# Altium PCB intento2_PCB.PcbDoc
Units mil, origin at the board's own origin, x right, y up, seen from the top; angles counter-clockwise.
Board outline 1520 x 850 mil, 2 copper layers (Top Layer, Bottom Layer); 13 components, 9 nets, 42 pads, 31 vias.
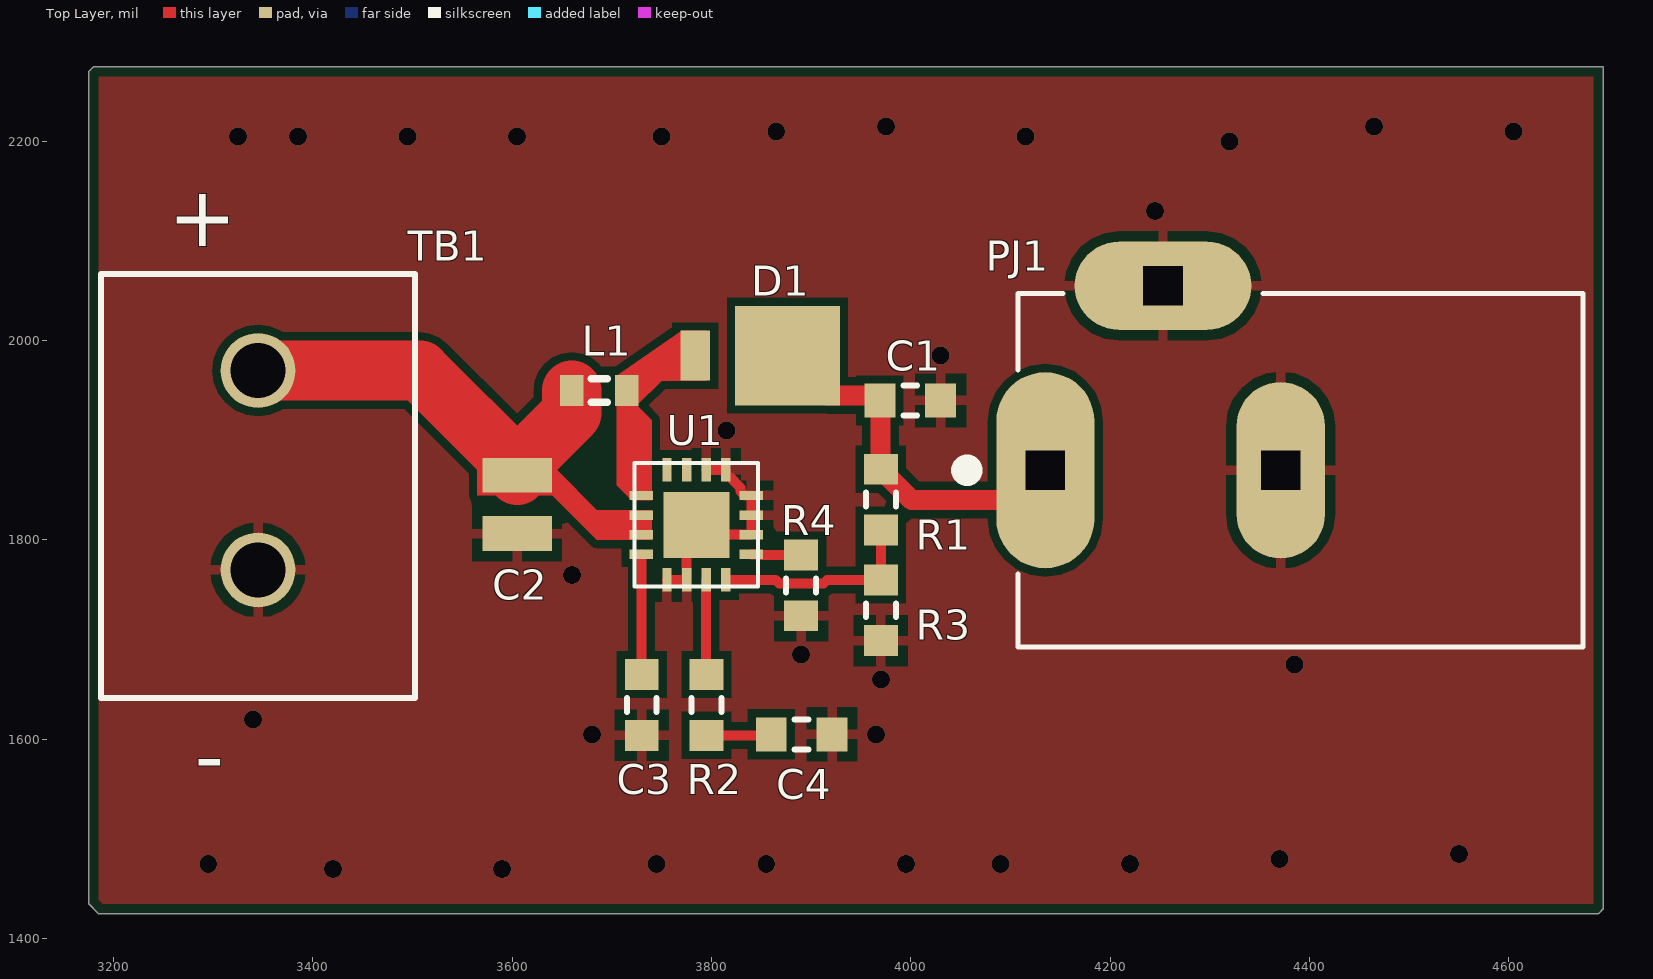
[diagram p0: Top Layer view]
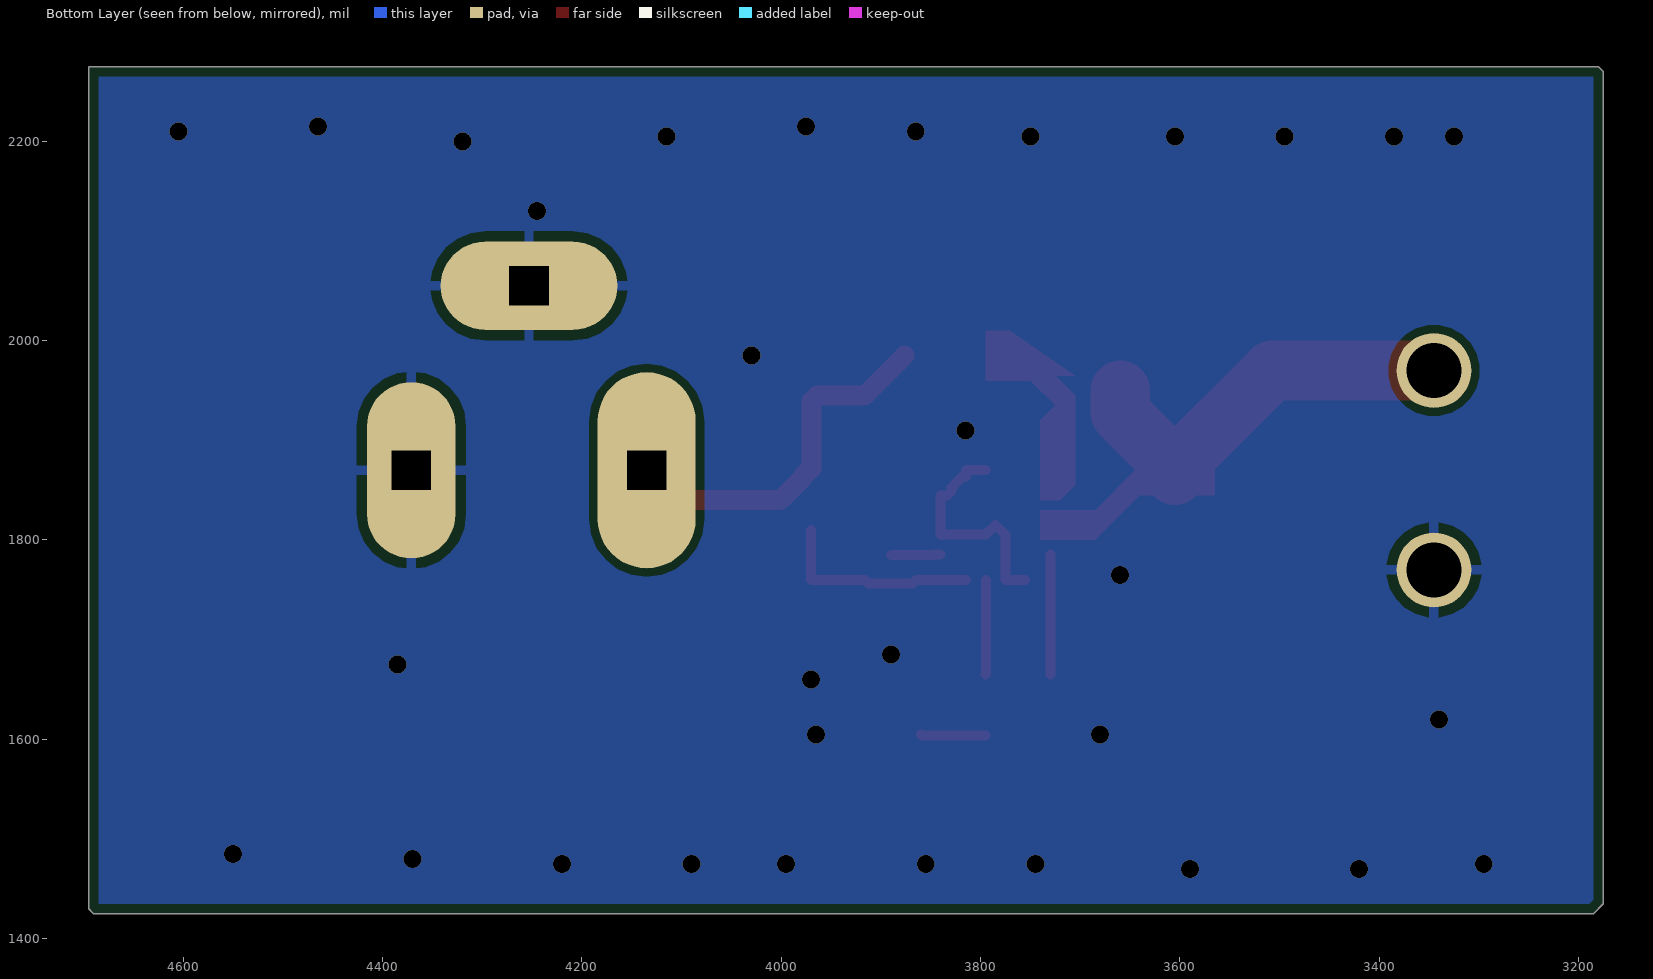
[diagram p1: Bottom Layer view, seen from below]
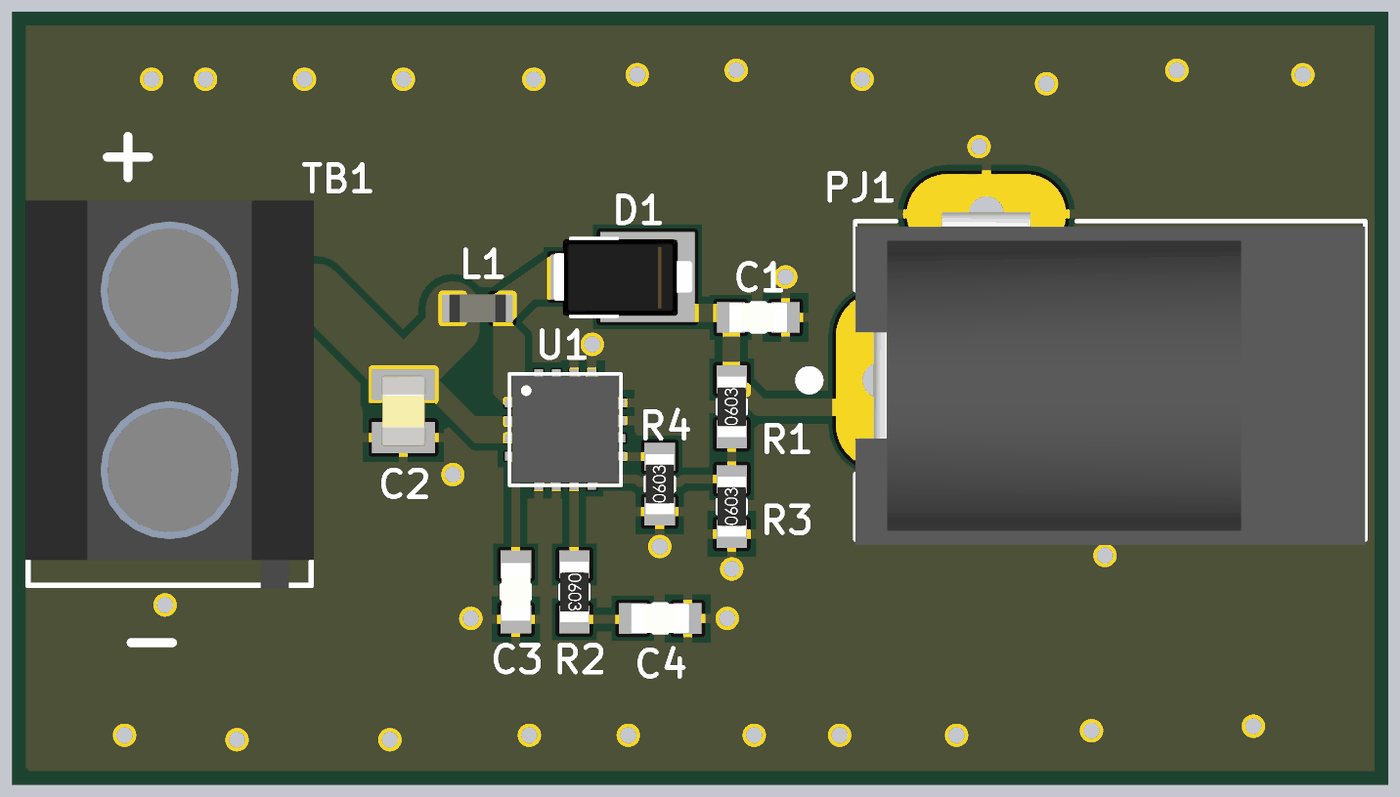
[diagram p2: 3D render of the assembled board from above, using the file's embedded part models]

## Layer stack, top to bottom
Top Solder: solder mask 0.4, Solder Resist, Dk 3.5
Top Layer: signal copper 1.4
Dielectric 1: dielectric 12.6, FR-4, Dk 4.8
Bottom Layer: signal copper 1.4
Bottom Solder: solder mask 0.4, Solder Resist, Dk 3.5

## Board outline
3175,1435 3175,2270 3180,2275 4695,2275 4695,1430 4690,1425 3185,1425

## Design rules (kind name [scope] priority, off if disabled: settings)
BoardOutlineClearance [All] p1: gap=8 ignorepadtopadclearanceinfootprint=FALSE
Clearance [All] p1: gap=8 ignorepadtopadclearanceinfootprint=FALSE
HoleSize [All] p1: absolutevalues=TRUE maxlimit=500 minlimit=12 maxpercent=80.000 minpercent=20.000
HoleToHoleClearance [All] p1: gap=14 allowstackedmicrovias=TRUE
MinimumSolderMaskSliver [All] p1: minsoldermaskwidth=4
PolygonConnect PolygonConnect_via [IsVia] p1: connectstyle=Direct reliefconductorwidth=10 reliefentries=4 polygonreliefangle="90 Angle" airgapwidth=10
PolygonConnect [All] p2: connectstyle=Relief reliefconductorwidth=10 reliefentries=4 polygonreliefangle="90 Angle" airgapwidth=10
RoutingVias [All] p1: holewidth=12 width=40 viastyle="Through Hole" minholewidth=12 minwidth=18 maxholewidth=100 maxwidth=50
SilkToSilkClearance [All] p1: silktosilkclearance=2
SilkToSolderMaskClearance [IsPad] p1: minsilkscreentomaskgap=0.1 clearancetoexposedcopper=TRUE
SolderMaskExpansion [All] p1: expansion=4 istentingtop=FALSE
SupplyNets "Schematic Supply Nets_2" [InNet('12V')] p1: voltage=0.000
SupplyNets "Schematic Supply Nets_1" [InNet('GND')] p2: voltage=0.000
SupplyNets "Schematic Supply Nets" [InNet('24V')] p3: voltage=0.000
Width width_24 [InNetClass('24V_CLASS')] p1: maxlimit=30 minlimit=20 preferedwidth=30
Width Width_12 [InNetClass('12VCLASS')] p2: maxlimit=60 minlimit=15 preferedwidth=60
Width [All] p3: maxlimit=10 minlimit=10 preferedwidth=10
25 further rules are at their usual default settings.

## Classes and differential pairs
net class 24V_CLASS: 24V
net class 12VCLASS: 12V NetD1_1

## Components (designator, comment, footprint, x,y, rotation, side; value= is the part's Value field where it differs from the comment)
C1 "10u" CAP_0603 3999.5,1940 r180 top
C2 "33u" CAP_0805 3605,1806.34 r90 top
C3 "22nF" CAP_0603 3730,1634.5 r90 top value=22n
C4 "22nF" CAP_0603 3890.5,1605 r180 top value=22n
D1 "SS3P4-M3/84A" "DO-220AA(POWER DIODE)" 3830,1985 r180 top
L1 "IND 15UH 2MA 1.5 OHM" L_0603 3687.44,1950 r0 top value=15u
PJ1 "CONN PWR JACK 2.5X5.5MM SOLDER" PWR_JACK_2.50mm 4253.11,1962.52 r0 top
R1 "187K" RES_0603 3970,1840.5 r90 top
R2 "1K" RES_0603 3795,1634.5 r270 top
R3 "10K" RES_0603 3970,1729.5 r90 top
R4 "100K" RES_0603 3890,1754.5 r90 top
TB1 "TERM BLK 2P SIDE ENT 5.08MM PCB" TB_2x1_5.08mm 3345,1870 r270 top
U1 "TPS55340RTER" WQFN-16_3X3MM 3784.88,1815.16 r0 top

## Footprints (in the part's own frame and the unit in brackets; to place one, negate y for a bottom-side part, rotate by r counter-clockwise, add the part's x,y. Pads: shape width x height; smd on the part's side, far side on the other; paste and mask are expansions set on the pad)
CAP_0603 [mil]
  rect 31x34 smd: 1(-30.5,0) 2(30.5,0)
  silkscreen extent -7,-15 7,15, body extent -32,-16 32,16
CAP_0805 [mil]
  rect 35x70 smd: 1(0,0) 2(58.66,0)
  body extent -10,-25 69,25, height 49
"DO-220AA(POWER DIODE)" [mil]
  rect 30x50 smd: 1(46.28,0)
  rect 105.12x100 smd: 2(-46.28,0)
  body extent -96,-45 58,46, height 45
L_0603 [mm]
  rect 0.6x0.8 smd: 1(-0.7,0) 2(0.7,0)
  silkscreen extent -0.2,-0.3 0.2,0.3, body extent -0.8,-0.4 0.8,0.4, height 0.45
PWR_JACK_2.50mm [mm]
  oval 2.5x5 hole 1 square: 1(-3,-2.35)
  oval 2.25x4.5 hole 1 square: 2(3,-2.35)
  oval 4.5x2.25 hole 1 square: 3(0,2.35)
  silkscreen extent -5.2,-6.85 10.7,2.15, body extent -3.7,-7 10.7,2.4, height 11
RES_0603 [mil]
  rect 31x34 smd: 1(-30.5,0) 2(30.5,0)
  silkscreen extent -7,-15 7,15, body extent -33,-16 33,16
TB_2x1_5.08mm [mil]
  round 75 / inner round 60 / far side round 75 hole 55 paste-99999 mask+0: 1(-100,0) 2(100,0)
  silkscreen extent -197,-157 228,157, body extent -200,-160 231,160, height 396
WQFN-16_3X3MM [mm]
  rect 0.6x0.24 smd paste+0 mask+0.051: 1(-1.4,0.75) 2(-1.4,0.25) 3(-1.4,-0.25) 4(-1.4,-0.75) 9(1.4,-0.75) 10(1.4,-0.25) 11(1.4,0.25) 12(1.4,0.75)
  rect 0.24x0.6 smd paste+0 mask+0.051: 5(-0.75,-1.4) 6(-0.25,-1.4) 7(0.25,-1.4) 8(0.75,-1.4) 13(0.75,1.4) 14(0.25,1.4) 15(-0.25,1.4) 16(-0.75,1.4)
  rect 1.68x1.68 smd paste-0.827 mask+0.051: 17(0,0)
  silkscreen extent -1.57,-1.57 1.58,1.58, body extent -1.5,-1.5 1.5,1.5, height 0.8

## Part data
C1: library part CAP_10u_0603, "CAP CER 10UF 10V X5R 0603", Manufacturer="Samsung Electro-Mechanics", Manufacturer Part Number 1=CL10A106KP8NNNC, Supplier Part Number 1=1276-1192-1-ND, ComponentLink1Description="New link", ComponentLink1URL=https://www.digikey.com/en/products/detail/samsung-electro-mechanics/CL10A106KP8NNNC/3886850, Supplier 1=Digikey
C2: library part CAP_33u_0805, "CAP CER 33UF 6.3V X5R 0805", Manufacturer="TDK Corporation", Manufacturer Part Number 1=C2012X5R0J336M125AC, Supplier Part Number 1=445-5986-1-ND, ComponentLink1Description="New link", ComponentLink1URL=https://www.digikey.com/en/products/detail/samsung-electro-mechanics/CL10A106KP8NNNC/3886850, Supplier 1=Digikey
C3 C4: library part CAP_22nF_0603, "CAP CER 0.027UF 25V X7R 0603", Manufacturer="Cal-Chip Electronics, Inc.", Manufacturer Part Number 1=GMC10X7R273J25NT, Supplier Part Number 1=2571-GMC10X7R273J25NTTR-ND, ComponentLink1Description="New link", ComponentLink1URL=https://www.digikey.com/en/products/detail/cal-chip-electronics-inc/GMC10X7R273J25NT/13908236, Supplier 1=Digikey
D1: "DIODE SCHOTTKY 40V 3A DO220AA", Manufacturer="Vishay General Semiconductor - Diodes Division", Supplier Part Number 1=SS3P4-M3/84AGICT-ND, ComponentLink1Description="New link", ComponentLink1URL=https://www.digikey.com/en/products/detail/vishay-general-semiconductor-diodes-division/SS3P4-M3-84A/1147819?s=N4IgTCBcDaIMpwMwAUAsBaAsog9ADlQEEQBdAXyA, Manufacturer Part Number 1=SS3P4-M3/84A, Supplier 1=Digikey
L1: library part L_15uH_0603, "FIXED IND 15UH 2MA 1.5 OHM SMD", Manufacturer="TDK Corporation", Manufacturer Part Number 1=MLF1608C150KTA00, Supplier Part Number 1=445-1027-1-ND, ComponentLink1Description="New link", ComponentLink1URL=https://www.digikey.com/en/products/detail/tdk-corporation/MLF1608C150KTA00/504196, Supplier 1=Digi-key
PJ1: library part PWR_JACK_2.50mm, "Power Barrel Connector Jack 2.50mm ID (0.098\"), 5.50mm OD (0.217\") Through Hole, Right Angle", Manufacturer="Same Sky (Formerly CUI Devices)", Manufacturer Part Number 1=PJ-002B, Supplier Part Number 1=CP-002B-ND, ComponentLink1Description="New link", ComponentLink1URL=https://www.digikey.com/en/products/detail/same-sky-formerly-cui-devices/PJ-002B/96965, Supplier 1=Digikey
R1: library part RES_187K_0603, "RES SMD 187K OHM 1% 1/10W 0603", Manufacturer="Panasonic Electronic Components", Manufacturer Part Number 1=ERJ-3EKF1873V, Supplier Part Number 1=P187KHTR-ND, ComponentLink1Description="New link", ComponentLink1URL=https://www.digikey.com/en/products/detail/panasonic-electronic-components/ERJ-3EKF1873V/196173, Supplier 1=Digi-key
R2: library part RES_1K_0603, "RES 1K OHM 1% 1/10W 0603", Manufacturer="Stackpole Electronics Inc", Manufacturer Part Number 1=RMCF0603FT1K00, Supplier Part Number 1=RMCF0603FT1K00CT-ND, ComponentLink1Description="New link", ComponentLink1URL=https://www.digikey.com/en/products/detail/stackpole-electronics-inc/RMCF0603FT1K00/1761077, Supplier 1=Digi-key
R3: library part RES_10K_0603, "RES 10K OHM 1% 1/10W 0603", Manufacturer="Stackpole Electronics Inc", Manufacturer Part Number 1=RMCF0603FT100R, Supplier Part Number 1=RMCF0603FT10K0CT-ND, ComponentLink1Description="New link", ComponentLink1URL=https://www.digikey.com/en/products/detail/stackpole-electronics-inc/RMCF0603FT10K0/1761235, Supplier 1=Digi-key
R4: library part RES_100K_0603, "Fixed Resistor, Metal Glaze/thick Film, 0.1W, 100000ohm, 50V, 5% +/-Tol, 200ppm/Cel, Surface Mount, 0603", Case/Package=0603, Manufacturer="Stackpole Electronics Inc", Manufacturer Part Number 1=RMCF0603FT100R, Supplier Part Number 1=RMCF0603FT10K0CT-ND, ComponentLink1Description="New link", ComponentLink1URL=https://www.digikey.com/en/products/detail/stackpole-electronics-inc/RMCF0603FT10K0/1761235, Supplier 1=Digi-key
TB1: library part TB_2x1_5.08mm, "2 Bloques de terminales - Cable a placa Horizontal con placa 0.200\" (5.08mm) Orificio pasante", Manufacturer=Weidmüller, Manufacturer Part Number 1=1760510000, Supplier Part Number 1=281-1882-ND, ComponentLink1Description="New link", ComponentLink1URL=https://www.digikey.com/es/products/detail/weidm%C3%BCller/1760510000/459739, Supplier 1=Digi-key
U1: "IC REG BOOST ADJ 5.25A 16WQFN", Manufacturer="Texas Instruments", Supplier Part Number 1=296-37677-2-ND, ComponentLink1Description="New link", ComponentLink1URL=https://www.digikey.com/en/products/detail/texas-instruments/TPS55340RTER/3503781?s=N4IgTCBcDaIC4AcDOBWFBmALABgE5wFNcQBdAXyA, Manufacturer Part Number 1=TPS55340RTER, Supplier 1=Digi-key

## Via types
v1: diameter 18, hole 18, Top Layer to Bottom Layer, 31 vias

## Nets (pads, with @x,y where several pads share a name; then routed paths per layer and width w, separated by ;. In a path a pad name is that pad's centre, name@x,y a point inside that pad or via, vN(x,y) a via of type N, cw(c..) or ccw(c..) an arc to the next point about the centre after c; other vN are vias at no path point)
12V: C2.2 L1.1 TB1.1 U1.2 U1.3 | length 408.1
  Top Layer w60: TB1.1 3507.5,1970 C2.2@3605,1872.5 ; C2.2 C2.2@3605,1872.5 ; L1.1 3659.88,1927.38 C2.2@3605,1872.5
24V: C1.2 D1.2 PJ1.1 R1.2 | length 371.9
  Top Layer w20: D1.2 3916.28,1945 3964,1945 C1.2 3969.5,1939.5 3969.5,1871.5 R1.2 3971.5,1871 3977,1865.5 3977,1864 4001,1840 4105,1840 PJ1.1
GND: C1.1 C2.1 C3.1 C4.1 PJ1.2 PJ1.3 R3.1 R4.1 TB1.2 U1.5 U1.6 U1.10 U1.11 U1.12 U1.13 U1.14 U1.17 | length 239.3
  Top Layer w10: U1.5 U1.6 3775.04,1805.31 U1.17 3794.72,1805.31 U1.10 U1.11 U1.12 3833.46,1844.68 3828.95,1849.2 3828.95,1852.78 3818.27,1863.46 3814.69,1863.46 3814.41,1863.74 U1.13 U1.14
  other v1: 3420,1470 3590,1470 3295,1475 3745,1475 3855,1475 3995,1475 4090,1475 4220,1475 4370,1480 4550,1485 3680,1605 3965,1605 3340,1620 3970,1660 4385,1675 3890,1685 3660,1765 3815,1910 4030,1985 4245,2130 4320,2200 3325,2205 3385,2205 3495,2205 3605,2205 3750,2205 4115,2205 3865,2210 4605,2210 3975,2215 4465,2215
NetC3_2: C3.2 U1.4 | length 120.7
  Top Layer w10: U1.4 3729.76,1665.24 C3.2
NetC4_2: C4.2 R2.2 | length 65.4
  Top Layer w10: R2.2 3859,1604 C4.2
NetD1_1: D1.1 L1.2 U1.1
NetR1_1: R1.1 R3.2 U1.8 | length 208.5
  Top Layer w10: U1.8 3864.08,1760.04 3867.62,1756.5 3912.38,1756.5 3915.88,1760 R3.2 R1.1
NetR2_1: R2.1 U1.7 | length 95.2
  Top Layer w10: U1.7 3794.72,1665.28 R2.1
NetR4_2: R4.2 U1.9 | length 50.3
  Top Layer w10: U1.9 3846.54,1785.63 3847.17,1785 R4.2
pads on no net: U1.15 U1.16

## Polygon pours and split planes (outlines as drawn)
GND on Bottom Layer "GND_POLY_BOT" (solid, remove dead copper, pour order 2): 3175,1435 3175,2270 3180,2275 4695,2275 4695,1430 4690,1425 3185,1425
GND on Top Layer "GND_POLY_TOP" (solid, remove dead copper, pour order 0): 3175,1435 3175,2270 3180,2275 4695,2275 4695,1430 4690,1425 3185,1425

## Other copper
Top Layer:
  region net NetD1_1: 3705,1965 3725,1965 3770,2010 3795,2010 3795,1960 3750,1960 3725,1935 3740,1920 3740,1840 3720,1840 3705,1855 3705,1945 3770,2010
  region net 12V: 3565,1885 3645,1885 3645,1870 3685,1830 3740,1830 3740,1800 3685,1800 3640,1845 3565,1845

## Silkscreen, mask and mechanical layers (free items; w line width, h text height)
Top Overlay:
  text "+" at 3255,2095 h60
  text "-" at 3281.55,1554.6 h60
Board Shape:
  lines w10: 3175,1435 3175,2270 3180,2275 4690,2275 4695,2275 4695,1430 4690,1425 3185,1425 3175,1435